# EAGLE board hid (EAGLE 6.5.0)
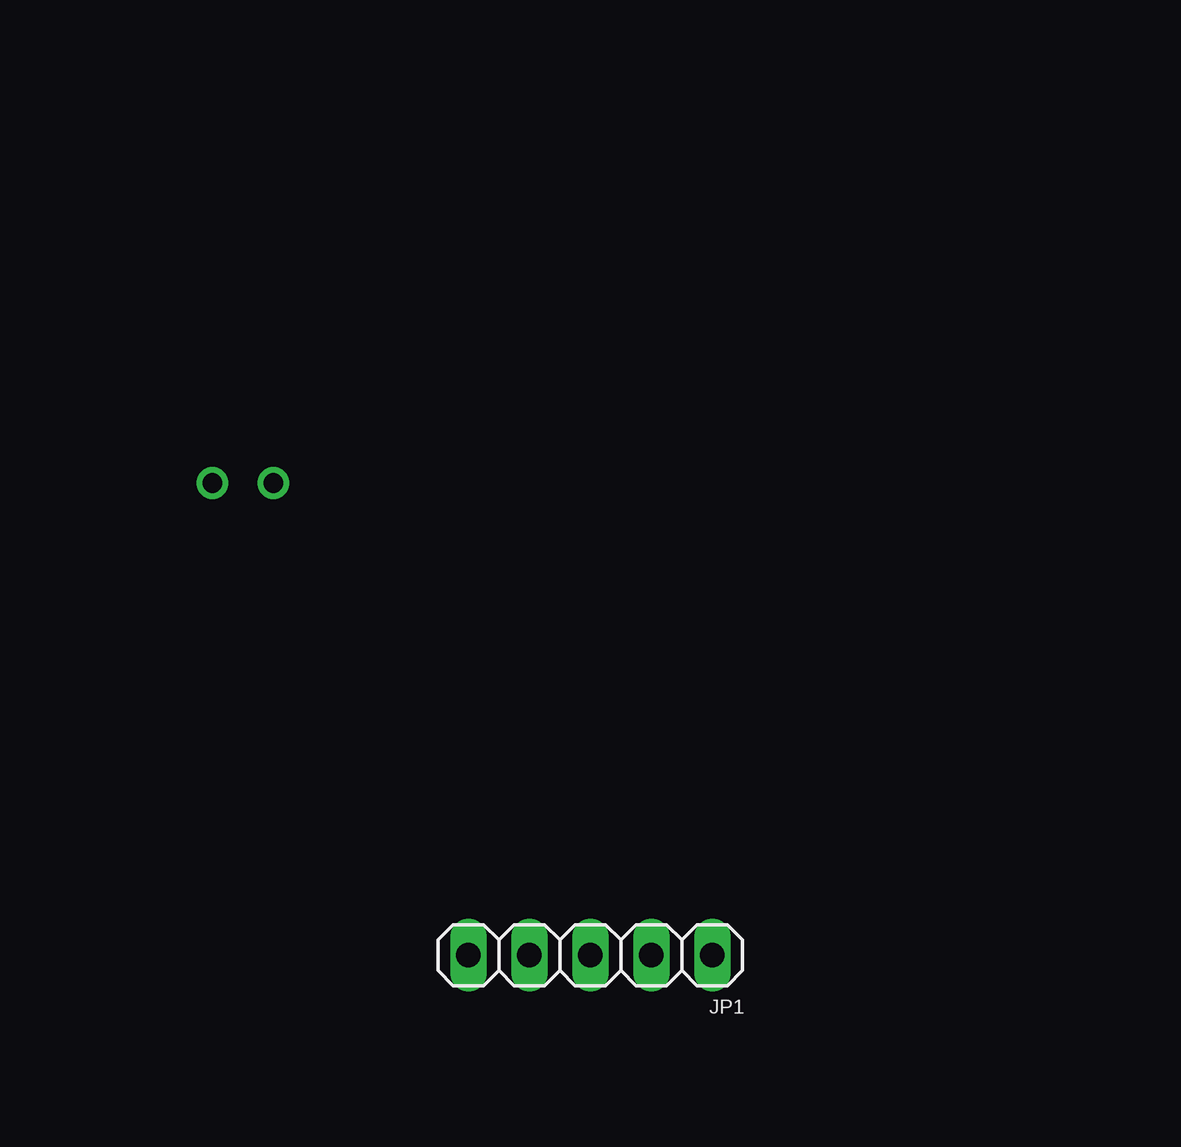
[diagram p0: board, top side]
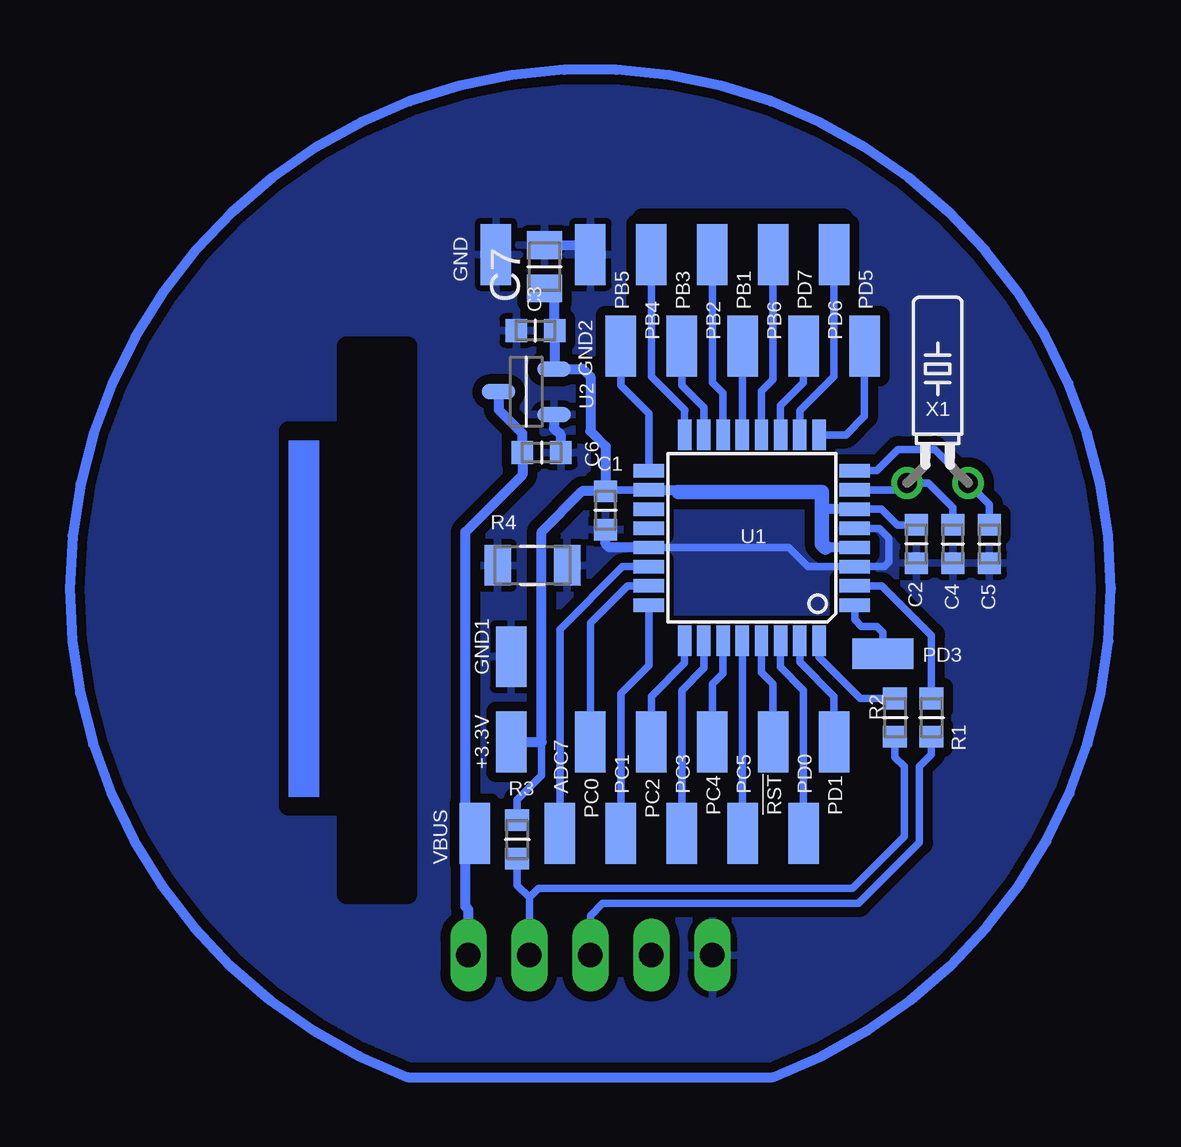
[diagram p1: board, bottom side, seen from below]

No outline drawn. Coordinates in mm, seen from the top.
Copper layers (1*16): Top 0.035mm / dielectric 1.5mm / Bottom 0.035mm
Design rules "default *": minimum track width 10mil, minimum drill 24mil, track to track 8mil, track to pad 8mil, pad to pad 8mil, via to via 8mil, smd to smd 8mil, copper to edge 40mil, drill to drill 10mil, minimum pad ring 10mil, minimum via ring 8mil, stop-mask expansion 4mil, vias tented up to drill 0mil, thermal gap 10mil
bRestrict: 11 lines

## Footprints (pad centres in the part's own frame; a part is rotated, then mirrored left to right if it is on the bottom)
SMD1,27-2,54 = smd 1.27 x 2.54: 1 0,0
CAPC1608X92N = smd 0.9 x 0.95: 1 -0.8,0; 2 0.8,0
CAPC2012X145AN = smd 1.15 x 1.45: 1 -0.9,0; 2 0.9,0
1X05 = drill 1.016 long: 1 -5.08,0; 2 -2.54,0; 3 0,0; 4 2.54,0; 5 5.08,0
RESC1608X55N = smd 0.9 x 1: 1 -0.8,0; 2 0.8,0
RESC3115X70N = smd 1.1 x 1.7: 1 -1.45,0; 2 1.45,0
TQFP32-08 = smd 1.27 x 0.559: 1 -4.293,2.8; 2 -4.293,2; 3 -4.293,1.2; 4 -4.293,0.4; 5 -4.293,-0.4; 6 -4.293,-1.2; 7 -4.293,-2; 8 -4.293,-2.8; 17 4.293,-2.8; 18 4.293,-2; 19 4.293,-1.2; 20 4.293,-0.4; 21 4.293,0.4; 22 4.293,1.2; 23 4.293,2; 24 4.293,2.8 | smd 0.559 x 1.27: 9 -2.8,-4.293; 10 -2,-4.293; 11 -1.2,-4.293; 12 -0.4,-4.293; 13 0.4,-4.293; 14 1.2,-4.293; 15 2,-4.293; 16 2.8,-4.293; 25 2.8,4.293; 26 2,4.293; 27 1.2,4.293; 28 0.4,4.293; 29 -0.4,4.293; 30 -1.2,4.293; 31 -2,4.293; 32 -2.8,4.293
SOT95P280X135-3N = smd 1.4 x 0.65: 1 -1.15,0.95; 2 -1.15,-0.95; 3 1.15,0
TC26H = drill 0.813: 1 -1.27,0; 2 1.27,0

## Placement (x,y rotation side)
!RST  [SMD1,27-2,54]  -7.62,-6.35 0 bottom
+3.3V  [SMD1,27-2,54]  3.3,-6.35 180 bottom
ADC7  [SMD1,27-2,54]  1.27,-10.16 0 bottom
C1  1uF  [CAPC1608X92N]  -0.64,3.3 270 bottom
C2  1uF  [CAPC1608X92N]  -13.59,1.91 270 bottom
C3  1uF  [CAPC1608X92N]  2.29,10.79 180 bottom
C4  22pF  [CAPC1608X92N]  -15.11,1.91 90 bottom
C5  22pF  [CAPC1608X92N]  -16.64,1.91 90 bottom
C6  1uF  [CAPC1608X92N]  2.03,5.71 0 bottom
C7  NC  [CAPC2012X145AN]  1.91,13.46 90 bottom
GND  [SMD1,27-2,54]  3.94,13.97 0 bottom
GND1  [SMD1,27-2,54]  3.3,-2.79 0 bottom
GND2  [SMD1,27-2,54]  0,13.97 0 bottom
JP1  [1X05]  0,-15.24 180 top
PB1  [SMD1,27-2,54]  -6.35,10.16 0 bottom
PB2  [SMD1,27-2,54]  -5.08,13.97 0 bottom
PB3  [SMD1,27-2,54]  -3.81,10.16 0 bottom
PB4  [SMD1,27-2,54]  -2.54,13.97 0 bottom
PB5  [SMD1,27-2,54]  -1.27,10.16 0 bottom
PB6  [SMD1,27-2,54]  -7.62,13.97 0 bottom
PC0  [SMD1,27-2,54]  0,-6.35 0 bottom
PC1  [SMD1,27-2,54]  -1.27,-10.16 0 bottom
PC2  [SMD1,27-2,54]  -2.54,-6.35 0 bottom
PC3  [SMD1,27-2,54]  -3.81,-10.16 0 bottom
PC4  [SMD1,27-2,54]  -5.08,-6.35 0 bottom
PC5  [SMD1,27-2,54]  -6.35,-10.16 0 bottom
PD0  [SMD1,27-2,54]  -8.89,-10.16 0 bottom
PD1  [SMD1,27-2,54]  -10.16,-6.35 0 bottom
PD3  [SMD1,27-2,54]  -12.19,-2.67 270 bottom
PD5  [SMD1,27-2,54]  -11.43,10.16 0 bottom
PD6  [SMD1,27-2,54]  -10.16,13.97 0 bottom
PD7  [SMD1,27-2,54]  -8.89,10.16 0 bottom
R1  47R  [RESC1608X55N]  -12.7,-5.33 90 bottom
R2  47R  [RESC1608X55N]  -14.22,-5.33 90 bottom
R3  1K5  [RESC1608X55N]  3.05,-10.41 270 bottom
R4  0R  [RESC3115X70N]  2.41,1.02 0 bottom
U1  ATMEGA8-AI  [TQFP32-08]  -6.73,2.16 180 bottom
U2  MCP1700/TT  [SOT95P280X135-3N]  2.67,8.26 180 bottom
VBUS  [SMD1,27-2,54]  4.83,-10.16 180 bottom
X1  16MHz  [TC26H]  -14.48,4.45 0 bottom

## Library data of the parts
!RST +3.3V ADC7 GND GND1 GND2 PB1-PB6 PC0 PC1-PC5 PD0 PD1 PD3 PD5-PD7 VBUS = wirepad; PARTNO: Breakout
C1-C3 C6 = ipc-7351-capacitor; PARTNO: 1uF X7R 0603
C4 C5 = ipc-7351-capacitor; PARTNO: 22pF 0603
C7 = ipc-7351-capacitor; PARTNO: NC 0805
JP1 = pinhead-1; PARTNO: *
R1 R2 = ipc-7351-resistor; PARTNO: 47R 0603
R3 = ipc-7351-resistor; PARTNO: 1K5 0603
R4 = ipc-7351-resistor; PARTNO: 0R 1206
U1 = atmel; PARTNO: ATmega8A-AU
U2 = Misc Power; PARTNO: MCP1700T-3302E/TT
X1 = crystal; PARTNO: 16MHz Crystal TC26

## Nets
!RST: !RST.1 U1.29
+3.3V: +3.3V.1 C1.1 C2.1 C3.1 C7.1 R3.1 U1.4 U1.6 U1.18 U2.2
D2: R1.2 U1.32
D4: R2.2 U1.2
D+: JP1.3 R2.1
D-: JP1.2 R1.1 R3.2
GND: C1.2 C2.2 C3.2 C4.1 C5.1 C6.2 C7.2 GND1.1 GND2.1 GND.1 JP1.5 R4.1 R4.2 U1.3 U1.5 U1.21 U2.1
N$2: PD7.1 U1.11
N$3: PD6.1 U1.10
N$4: PD5.1 U1.9
N$5: PD0.1 U1.30
N$6: PD3.1 U1.1
N$7: PD1.1 U1.31
N$8: PC5.1 U1.28
N$9: PC4.1 U1.27
N$10: PC3.1 U1.26
N$11: PC2.1 U1.25
N$12: PC1.1 U1.24
N$13: PC0.1 U1.23
N$14: ADC7.1 U1.22
N$22: C4.2 U1.7 X1.1
N$23: C5.2 U1.8 X1.2
PB0: PB6.1 U1.12
PB1: PB1.1 U1.13
PB2: PB2.1 U1.14
PB3: PB3.1 U1.15
PB4: PB4.1 U1.16
PB5: PB5.1 U1.17
VBUS: C6.1 JP1.1 U2.3 VBUS.1

## Tracks (layer width: path | path; a pad name or v marks a point on that pad's centre or on a via)
!RST
  Bottom 0.305: U1.29 -7.13,-3.45 -7.62,-3.94 !RST.1
+3.3V
  Bottom 0.305: U1.6 -12.13,3.36 -12.79,2.71 C2.1 | U1.18 -0.45,4.16 C1.1 | R3.1 3.05,-8.76 2.03,-7.75 2.03,-6.35
  Bottom 0.406: U1.6 -9.65,3.36 | U1.4 -9.8,1.76 | U1.18 -3.65,4.16 -3.68,4.06 | -9.62,4.16 -9.65,4.06 | +3.3V.1 2.03,-6.35 2.03,2.41 0.34,4.1 C1.1 -0.64,5.97 0,6.6 0,8.89 0.32,9.21 U2.2 1.49,9.24 C3.1 1.49,12.14 C7.1
  Bottom 0.61: -9.8,1.76 -9.65,1.91 -9.65,3.36 -9.65,4.06 -3.68,4.06
D2
  Bottom 0.305: U1.32 -9.53,-2.8 -11.27,-4.53 R1.2
D4
  Bottom 0.305: R2.2 -14.22,-1.91 -12.16,0.16 U1.2
D+
  Bottom 0.305: JP1.3 0,-13.59 -0.51,-13.08 -11.18,-13.08 -13.72,-10.54 -13.72,-7.37 -14.22,-6.86 R2.1
D-
  Bottom 0.305: R1.1 -12.7,-6.99 -13.08,-7.37 -13.08,-10.29 -10.92,-12.45 2.16,-12.45 2.54,-12.83 | JP1.2 2.54,-12.83 | R3.2 3.05,-12.32 2.54,-12.83
GND
  Bottom 0.305: U1.5 -12.05,2.56 -12.45,2.16 -12.45,1.14 -12.26,0.96 U1.3 -9.07,0.96 -8.27,1.76 U1.21
  Bottom 0.406: U1.21 -0.78,1.76 -0.64,1.91 C1.2 | U2.1 1.52,6.72 1.23,6.44 C6.2 | C7.2 0.39,14.36 GND2.1
  pour Bottom (isolate 0.406): -22.86,22.86 -22.86,-24.13 22.86,-24.13 22.86,22.86
N$1
  Bottom 0.406: 7.62,-20.32 -7.62,-20.32 arc-319 7.62,-20.32
N$2
  Bottom 0.305: U1.11 -7.93,7.68 -8.89,8.64 PD7.1
N$3
  Bottom 0.305: PD6.1 -10.16,8.89 -8.73,7.46 U1.10
N$4
  Bottom 0.305: PD5.1 -11.43,7.24 -10.64,6.45 U1.9
N$5
  Bottom 0.305: U1.30 -7.93,-3.23 -8.89,-4.19 PD0.1
N$6
  Bottom 0.305: U1.1 -11.02,-1.25 -11.3,-1.52 -11.94,-1.52 -12.19,-1.78 PD3.1
N$7
  Bottom 0.305: U1.31 -8.73,-3.02 -10.16,-4.45 PD1.1
N$8
  Bottom 0.305: U1.28 -6.33,-10.14 PC5.1
N$9
  Bottom 0.305: U1.27 -5.53,-3.49 -5.08,-3.94 PC4.1
N$10
  Bottom 0.305: U1.26 -4.73,-3.27 -3.81,-4.19 PC3.1
N$11
  Bottom 0.305: U1.25 -3.93,-3.05 -2.54,-4.45 PC2.1
N$12
  Bottom 0.305: PC1.1 -1.27,-4.32 -2.44,-3.15 U1.24
N$13
  Bottom 0.305: U1.23 -1.56,0.16 0,-1.4 PC0.1
N$14
  Bottom 0.305: U1.22 -1.34,0.96 1.27,-1.65 ADC7.1
N$22
  Bottom 0.305: U1.7 -12.92,4.16 X1.1 -14.1,4.45 -15.11,3.43 C4.2
N$23
  Bottom 0.305: U1.8 -11.94,4.96 -12.83,5.84 -14.35,5.84 X1.2 -16.64,3.56 C5.2
PB0
  Bottom 0.305: PB6.1 -7.62,8.76 -7.13,8.27 U1.12
PB1
  Bottom 0.305: U1.13 -6.33,10.14 PB1.1
PB2
  Bottom 0.305: U1.14 -5.53,8.19 -5.08,8.64 PB2.1
PB3
  Bottom 0.305: PB3.1 -3.81,8.51 -4.73,7.59 U1.15
PB4
  Bottom 0.305: PB4.1 -2.54,8.89 -3.94,7.49 -3.93,7.36 U1.16
PB5
  Bottom 0.305: PB5.1 -1.27,8.51 -2.44,7.34 U1.17
VBUS
  Bottom 0.406: JP1.1 5.08,-13.34 5.21,-13.21 5.21,-10.16 | 5.21,-10.16 5.21,2.41 2.83,4.79 C6.1 2.83,6.51 3.82,7.5 U2.3 | VBUS.1 5.21,-10.16
(copper drawn outside any net)
  shapes: Bottom area x1